# Allegro board IIC_UART_Hub_V1.0.brd
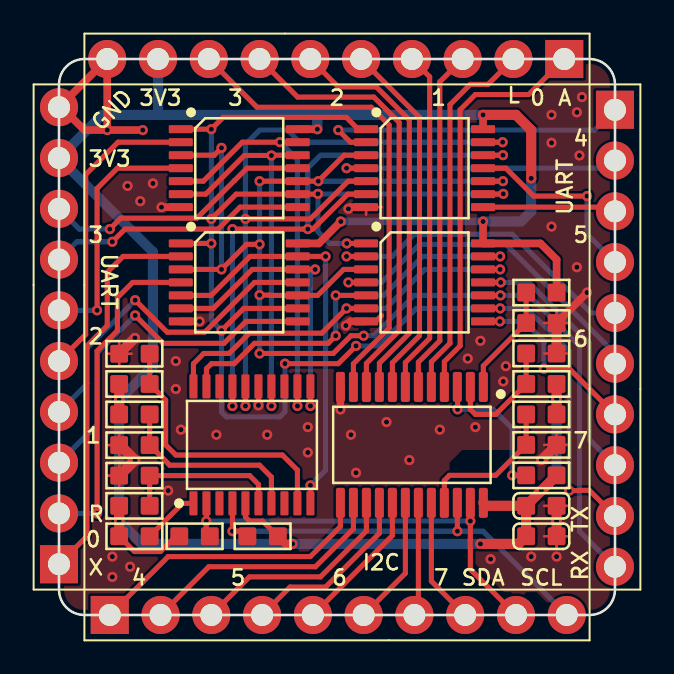
[diagram p0: board, top side]
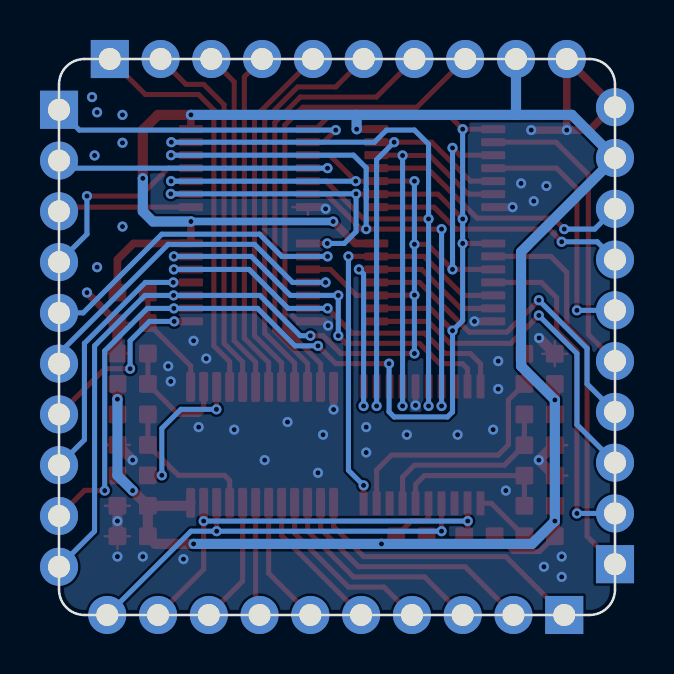
[diagram p1: board, bottom side, seen from below]

Outline 27.81 x 27.81 mm; copper layers: TOP, BOTTOM. Coordinates in mm from the lower left corner of the outline.
Outline path: 0,26.54 0,1.27 ; 0,26.54 arc(0.37,27.44) 1.27,27.81 ; 0,26.54 arc(0.37,27.44) 1.27,27.81 ; 0,26.54 0,1.27 ; 0,1.27 arc(0.37,0.37) 1.27,0 ; 0,1.27 arc(0.37,0.37) 1.27,0 ; 1.27,27.81 26.54,27.81 ; 1.27,27.81 26.54,27.81 ; 26.54,27.81 arc(27.44,27.44) 27.81,26.54 ; 26.54,27.81 arc(27.44,27.44) 27.81,26.54 ; 1.27,0 26.54,0 ; 1.27,0 26.54,0 ; 26.54,0 arc(27.44,0.37) 27.81,1.27 ; 26.54,0 arc(27.44,0.37) 27.81,1.27 ; 27.81,26.54 27.81,1.27 ; 27.81,26.54 27.81,1.27

## Design rules (mm)
constraint set DEFAULT: min track width 0.127

## Placement (name value [footprint] x y rotation side)
C1  100nF  [C0603]  24.13 3.94 0 top
C2  10uF  [C0603]  24.13 5.46 0 top
J3  Header 1x10 2.54mm  [HEADER10P_2D54_DIP]  25.27 27.81 270 top
J4  Header 1x10 2.54mm  [HEADER10P_2D54_DIP]  2.54 0 90 top
J5  Header 1x10 2.54mm  [HEADER10P_2D54_DIP]  0 2.54 180 top
J6  Header 1x10 2.54mm  [HEADER10P_2D54_DIP]  27.81 25.27 0 top
R4  10K  [R0603]  24.13 6.99 0 top
R5  DNP  [R0603]  24.13 16.13 180 top
R6  DNP  [R0603]  24.13 11.56 180 top
R7  DNP  [R0603]  24.13 10.03 180 top
R8  10K  [R0603]  24.13 14.61 180 top
R9  10K  [R0603]  24.13 13.08 180 top
R10  10K  [R0603]  24.13 8.51 180 top
R11  DNP  [R0603]  3.77 5.46 180 top
R12  10K  [R0603]  3.77 3.94 180 top
R15  DNP  [R0603]  3.77 10.03 180 top
R16  DNP  [R0603]  3.77 11.56 180 top
R23  10K  [R0603]  3.77 6.97 180 top
R24  10K  [R0603]  3.77 8.5 180 top
R25  10K  [R0603]  3.77 13.07 180 top
R26  4.7K  [R0603]  6.78 3.94 180 top
R27  4.7K  [R0603]  10.19 3.94 0 top
U1  CONTROLLER-TCA9548A  [TSSOP24_0D65_7_8X4_4X1D2MM]  17.65 8.51 180 top
U2  PCF8574  [TSSOP20-0_65-6_5X4_4X1MM]  9.65 8.51 0 top
U3  CD4066  [TSSOP14_0D65_5X4D4X1D2MM]  9.02 16.64 270 top
U4  CD4066  [TSSOP14_0D65_5X4D4X1D2MM]  18.29 22.35 270 top
U5  CD4066  [TSSOP14_0D65_5X4D4X1D2MM]  9.02 22.35 270 top
U6  CD4066  [TSSOP14_0D65_5X4D4X1D2MM]  18.29 16.64 270 top

## Library data of the parts
C1 C2 = CC
J3-J6 = Header 1x10
R4-R12 R15 R16 R23-R27 = R
U1 = TCA9548A
U2 = PCF8574
U3-U6 = CD4066

## Footprints (pads in the part's own frame, mm; a bottom-side part is the same pattern mirrored in y, then rotated)
C0603
  rrect 0.889x0.889 smd: 1(-0.762,0) 2(0.762,0)
HEADER10P_2D54_DIP
  rect 1.905x1.905 hole 1.1: 1(0,0)
  round 1.905 hole 1.1: 2(0,-2.54) 3(0,-5.08) 4(0,-7.62) 5(0,-10.16) 6(0,-12.7) 7(0,-15.24) 8(0,-17.78) 9(0,-20.32) 10(0,-22.86)
R0603
  rrect 0.889x0.889 smd: 1(-0.762,0) 2(0.762,0)
TSSOP14_0D65_5X4D4X1D2MM
  rrect 0.4x1.2 smd: 1(-1.95,-2.925) 2(-1.3,-2.925) 3(-0.65,-2.925) 4(0,-2.925) 5(0.65,-2.925) 6(1.3,-2.925) 7(1.95,-2.925) 8(1.95,2.925) 9(1.3,2.925) 10(0.65,2.925) 11(0,2.925) 12(-0.65,2.925) 13(-1.3,2.925) 14(-1.95,2.925)
TSSOP20-0_65-6_5X4_4X1MM
  rrect 0.4x1.2 smd: 1(-2.925,-2.925) 2(-2.275,-2.925) 3(-1.625,-2.925) 4(-0.975,-2.925) 5(-0.325,-2.925) 6(0.325,-2.925) 7(0.975,-2.925) 8(1.625,-2.925) 9(2.275,-2.925) 10(2.925,-2.925) 11(2.925,2.925) 12(2.275,2.925) 13(1.625,2.925) 14(0.975,2.925) 15(0.325,2.925) 16(-0.325,2.925) 17(-0.975,2.925) 18(-1.625,2.925) 19(-2.275,2.925) 20(-2.925,2.925)
TSSOP24_0D65_7_8X4_4X1D2MM
  rrect 0.45x1.5 smd: 1(-3.575,-2.9) 2(-2.925,-2.9) 3(-2.275,-2.9) 4(-1.625,-2.9) 5(-0.975,-2.9) 6(-0.325,-2.9) 7(0.325,-2.9) 8(0.975,-2.9) 9(1.625,-2.9) 10(2.275,-2.9) 11(2.925,-2.9) 12(3.575,-2.9) 13(3.575,2.9) 14(2.925,2.9) 15(2.275,2.9) 16(1.625,2.9) 17(0.975,2.9) 18(0.325,2.9) 19(-0.325,2.9) 20(-0.975,2.9) 21(-1.625,2.9) 22(-2.275,2.9) 23(-2.925,2.9) 24(-3.575,2.9)

## Nets
3V3: C1.1 C2.1 J3.9 J5.9 R4.2 R5.1 R6.1 R7.1 R11.2 R12.2 R15.2 R16.2 R26.2 R27.2 U1.24(VCC) U2.5(VCC) U3.14 U4.14 U5.14 U6.14
GND: C1.2 C2.2 J3.10 J5.10 R8.1 R9.1 R10.1 R23.2 R24.2 R25.2 U1.12 U2.15 U3.7(VSS) U4.7(VSS) U5.7(VSS) U6.7(VSS)
A0: R5.2 R8.2 U1.1
A1: R6.2 R9.2 U1.2
A2: R7.2 R10.2 U1.21
CH0: U2.10 U3.5 U3.13
CH1: U2.11 U3.6 U3.12
CH2: U2.12 U5.5 U5.13
CH3: U2.14 U5.6 U5.12
CH4: U2.16 U4.5 U4.13
CH5: U2.17 U4.6 U4.12
CH6: U2.19 U6.5 U6.13
CH7: U2.20 U6.6 U6.12
INPUT_RX: J6.10 U3.3 U3.10 U4.3 U4.10 U5.3 U5.10 U6.3 U6.10
INPUT_SCL: J4.10 R27.1 U1.22 U2.4
INPUT_SDA: J4.9 R26.1 U1.23 U2.2
INPUT_TX: J6.9 U3.1 U3.9 U4.1 U4.9 U5.1 U5.9 U6.1 U6.9
RX0: J5.2 U3.4
RX1: J5.4 U3.11
RX2: J5.6 U5.4
RX3: J5.8 U5.11
RX4: J6.2 U4.4
RX5: J6.4 U4.11
RX6: J6.6 U6.4
RX7: J6.8 U6.11
SCL_0: J3.2 U1.5
SCL_1: J3.4 U1.7
SCL_2: J3.6 U1.9
SCL_3: J3.8 U1.11
SCL_4: J4.2 U1.14
SCL_5: J4.4 U1.16
SCL_6: J4.6 U1.18
SCL_7: J4.8 U1.20
SDA_0: J3.1 U1.4
SDA_1: J3.3 U1.6
SDA_2: J3.5 U1.8
SDA_3: J3.7 U1.10
SDA_4: J4.1 U1.13
SDA_5: J4.3 U1.15
SDA_6: J4.5 U1.17
SDA_7: J4.7 U1.19
TX0: J5.1 U3.2
TX1: J5.3 U3.8
TX2: J5.5 U5.2
TX3: J5.7 U5.8
TX4: J6.1 U4.2
TX5: J6.3 U4.8
TX6: J6.5 U6.2
TX7: J6.7 U6.8
N21649397: R4.1 U1.3
N21654351: R11.1 R23.1 U2.6
N21654354: R15.1 R24.1 U2.7
N21654357: R16.1 R25.1 U2.9
N21654696: R12.1 U2.1

Pads without a net: U2 3 8 13 18

## Via types
v1: diameter 0.508, hole 0.254, TOP to BOTTOM, 119 vias

## Routing (per net, layer and track width the routed paths; a pad name or vN(x,y) marks a point on that pad's centre or on a via; arc(x,y) is an arc through that point)
3V3: length 117.6
  TOP w0.254: R27.2 10.19,4.7 9.52,4.7 9.33,4.9 U2.5 ; R26.2 5.84,3.94 5.08,3.18 3.77,3.18 R12.2
  TOP w0.381: v1(21.21,19.69) U6.14 24.09,18.59 24.89,17.78 R5.1 ; R27.2 11.33,3.56 v1(11.68,3.56) ; U5.14 v1(12.92,24.3) ; U3.14 13,18.59 v1(14.1,19.69) ; U4.14 v1(21.21,25.02)
  TOP w0.508: C2.1 v1(24.13,6.22) R4.2 ; C2.1 21.38,5.46 U1.24 ; C2.1 C1.1 22.99,3.56 v1(21.08,3.56) ; v1(23.62,21.84) 23.62,24.26 22.86,25.02 v1(21.21,25.02) ; R11.2 v1(3.01,4.7) R12.2 ; R6.1 v1(24.89,10.8) R7.1 ; R16.2 v1(3.01,10.76) R15.2
  BOTTOM w0.381: v1(14.1,19.69) v1(21.21,19.69)
  BOTTOM w0.508: v1(23.62,21.84) 23.62,20.19 23.11,19.69 v1(21.21,19.69) ; v1(24.89,10.8) R4.2 v1(24.13,6.22) ; 12.95,25.02 12.92,24.99 v1(12.92,24.3) ; 12.95,25.02 v1(21.21,25.02) ; 12.95,25.02 4.95,25.02 ; J3.9 4.95,25.02 ; 4.95,25.02 2.16,25.02 J5.9 4.7,18.16 4.7,12.45 v1(3.01,10.76) v1(3.01,4.7) 4.15,3.56 v1(11.68,3.56) v1(21.08,3.56)
GND: length 44.3
  TOP w0.127: 24.89,3.31 C1.2 ; C1.2 24.27,3.94 ; C1.2 25.51,3.94 ; 3.01,12.45 R25.2 ; R25.2 2.39,13.07 ; R25.2 3.63,13.07 ; R25.2 3.01,13.69 ; 2.39,8.5 R24.2 ; R24.2 3.01,7.87 ; R24.2 3.01,9.12 ; R8.1 24.89,15.23 ; R8.1 25.51,14.61 ; R8.1 24.27,14.61 ; R10.1 24.89,9.13 ; R10.1 24.89,7.89 ; R10.1 24.27,8.51 ; R10.1 25.51,8.51 ; 25.51,5.46 C2.2 24.27,5.46 ; 15.36,20.02 U4.7 16.14,20.4 ; 3.01,6.35 R23.2 ; R23.2 2.39,6.97 ; R23.2 3.01,7.6 ; 24.27,13.08 R9.1 25.51,13.08
  TOP w0.254: 16.14,14.98 15.84,14.69 U6.7 ; U2.15 v1(9.98,10.49)
  TOP w0.381: U1.12 v1(14.08,10.28) ; U3.7 v1(7.03,14.69) ; R8.1 v1(26.42,16.13) ; v1(14.35,14.48) 14.56,14.69 U6.7 ; 2.41,24.38 v1(2.41,24.26) v1(4.19,24.26) ; 2.41,24.38 J3.10 J5.10 0.13,25.4 1.27,24.26 2.29,24.26 2.41,24.38 ; v1(14.48,20.32) 14.56,20.4 U4.7 ; U5.7 v1(5.12,20.4)
  TOP w0.508: R23.2 3.04,6.97 v1(3.81,7.75) 3.06,8.5 R24.2 ; C2.2 v1(24.89,4.7) C1.2 ; v1(3.8,13.86) R25.2 ; R10.1 v1(24.13,7.75) ; R9.1 R8.1
  vias: v1(2.67,2.92) v1(2.67,1.91) v1(3.43,21.46) v1(3.56,2.41) v1(4.06,20.7) v1(4.7,21.59) v1(5.46,6.22) v1(5.84,12.7) v1(5.84,11.3) v1(6.1,9.27) v1(7.87,9.02) v1(10.41,9.02) v1(12.45,9.4) v1(12.45,8.13) v1(14.6,9.02) v1(14.86,7.11) v1(16.38,9.65) v1(17.53,7.75) v1(19.05,9.27) v1(20.45,12.83) v1(20.83,9.4) v1(21.08,13.72) v1(21.59,2.79) v1(22.22,11.68) v1(22.35,12.45) v1(23.62,2.92) v1(24.64,25.02) v1(24.64,23.62) v1(24.64,19.43) v1(24.89,2.92) v1(25.91,25.15) v1(25.91,17.4) v1(26.03,22.99) v1(26.16,25.91)
A0: length 5.6
  TOP w0.254: U1.1 21.23,12.47 R8.2 R5.2
A1: length 6.2
  TOP w0.254: U1.2 20.58,10.28 20.83,10.03 21.84,10.03 R6.2 R9.2
A2: length 7.5
  TOP w0.254: U1.21 19.28,6.73 19.53,6.99 21.84,6.99 R10.2 R7.2
CH0: length 20.7
  TOP w0.254: U3.5 7.61,15.99 9.55,17.94 U3.13 v1(13.33,17.94) ; U2.10 v1(12.58,6.48)
  BOTTOM w0.254: v1(12.58,6.48) 13.33,7.24 v1(13.33,17.94)
CH1: length 15.4
  TOP w0.254: U2.11 v1(12.58,10.45) ; v1(12.81,17.29) U3.12 9.67,17.29 7.72,15.34 U3.6
  BOTTOM w0.254: v1(12.58,10.45) 12.58,17.05 v1(12.81,17.29)
CH2: length 21.2
  TOP w0.254: U5.5 7.22,21.7 9.17,23.65 v1(11.05,23.65) U5.13 ; U2.12 v1(11.93,10.45)
  BOTTOM w0.254: v1(11.93,10.45) 11.93,22.77 v1(11.05,23.65)
CH3: length 20.2
  TOP w0.254: U2.14 v1(10.63,10.45) ; U5.6 7.34,21.05 9.27,22.99 v1(10.63,22.99) 10.64,23 U5.12
  BOTTOM w0.254: v1(10.63,10.45) v1(10.63,22.99)
CH4: length 35.3
  TOP w0.254: v1(9.33,19.81) 12.57,19.81 14.46,21.7 U4.5 ; U2.16 v1(9.33,10.45) ; U4.13 v1(22.2,23.65)
  BOTTOM w0.254: v1(9.33,10.45) v1(9.33,19.81) 9.33,23.55 10.03,24.26 11.43,24.26 12.03,23.65 v1(22.2,23.65)
CH5: length 31.3
  TOP w0.254: U2.17 v1(8.68,10.45) ; U4.6 14.45,21.05 12.7,19.3 v1(12.45,19.3) v1(8.68,19.3) ; U4.12 v1(22.21,23)
  BOTTOM w0.254: v1(8.68,10.45) v1(8.68,19.3) ; v1(12.45,19.3) 12.45,20.86 12.45,22.37 13.08,23 v1(22.21,23)
CH6: length 21.5
  TOP w0.254: U6.13 v1(22.07,17.94) ; U2.19 7.38,12.32 7.63,12.57 8.76,12.57 9.78,13.59 13.46,13.59 v1(13.84,13.97) ; U6.5 v1(13.84,15.99)
  BOTTOM w0.254: v1(22.07,17.94) 18.19,17.94 16.24,15.99 v1(13.84,15.99) v1(13.84,13.97)
CH7: length 20.3
  TOP w0.254: U6.12 v1(22.07,17.29) ; U6.6 v1(14.38,15.34) 13.14,14.1 9.52,14.1 8.51,13.08 7.24,13.08 6.73,12.57 U2.20
  BOTTOM w0.254: v1(22.07,17.29) 18.3,17.29 16.35,15.34 v1(14.38,15.34)
INPUT_RX: length 74.2
  TOP w0.254: U4.3 14.27,23 v1(12.97,21.7) U5.10 v1(10.03,21.7) ; U5.3 7.75,23 7.75,23.01 7.77,23.01 v1(8.13,23.37) ; U3.3 v1(8.13,17.29) 9.38,18.54 v1(10.03,18.54) ; U4.10 v1(22.21,21.7) ; v1(15.24,13.97) 14.61,13.97 13.72,13.08 v1(10.03,13.08) ; U6.3 14.24,17.29 12.94,15.99 U3.10 10.56,15.99 10.54,16 v1(10.03,16) ; U6.10 v1(22.08,15.99)
  BOTTOM w0.254: v1(10.03,13.08) v1(10.03,16) v1(10.03,18.54) v1(10.03,21.7) ; v1(8.13,23.37) v1(8.13,17.29) ; v1(22.21,21.7) v1(12.97,21.7) ; v1(15.24,13.97) 15.75,13.97 17.77,15.99 v1(22.08,15.99) 23.51,15.99 26.03,13.46 26.03,4.19 J6.10
INPUT_SCL: length 22.1
  TOP w0.254: v1(19.93,4.19) U1.22 ; R27.1 9.17,4.19 v1(8.68,4.19) U2.4
  BOTTOM w0.254: J4.10 21.21,4.19 v1(19.93,4.19) v1(8.68,4.19)
INPUT_SDA: length 21.5
  TOP w0.254: U1.23 v1(20.58,4.7) 20.58,3.77 20.57,3.77 20.57,3.35 20.58,3.34 20.58,2.28 J4.9 ; R26.1 7.37,4.11 v1(7.37,4.7) 7.38,4.71 U2.2
  BOTTOM w0.254: v1(20.58,4.7) v1(7.37,4.7)
INPUT_TX: length 83.3
  TOP w0.254: J6.9 26.53,6.24 26.05,6.24 26.03,6.22 v1(25.53,6.22) ; v1(8.13,14.22) 9.24,15.34 U3.9 ; v1(11.3,12.57) 13.97,12.57 v1(14.86,13.46) ; v1(12.95,21.07) 12.94,21.07 12.92,21.05 U5.9 8.86,21.05 v1(7.62,19.81) ; U5.1 v1(7.62,24.3) 8.21,24.89 14.37,24.89 14.96,24.3 U4.1 ; U6.1 v1(14.4,18.59) ; v1(22.23,21.07) 22.21,21.07 22.2,21.05 U4.9 ; U6.9 v1(22.07,15.34) ; U3.1 v1(7.62,18.59)
  BOTTOM w0.254: v1(25.53,6.22) 25.53,13.21 23.4,15.34 v1(22.07,15.34) 17.88,15.34 16,13.46 v1(14.86,13.46) ; v1(14.4,18.59) 13.54,18.59 12.95,19.18 12.95,19.51 12.95,19.52 v1(12.95,21.07) v1(22.23,21.07) ; v1(7.62,24.3) v1(7.62,19.81) v1(7.62,18.59) 7.62,14.73 v1(8.13,14.22) 8.13,10.16 8.38,9.91 11.05,9.91 11.3,10.16 v1(11.3,12.57)
RX0: length 16.6
  TOP w0.254: U3.4 3.68,16.64 2.92,15.88 2.92,14.22 1.9,13.21 v1(1.9,5.08)
  BOTTOM w0.254: v1(1.9,5.08) J5.2
RX1: length 17
  TOP w0.254: v1(3.81,15.75) 5.41,14.15 7.29,14.15 9.78,16.64 U3.11
  BOTTOM w0.254: J5.4 1.4,11.56 1.4,13.34 v1(3.81,15.75)
RX2: length 12.6
  TOP w0.254: v1(1.9,15.24) 1.9,21.34 2.92,22.35 U5.4
  BOTTOM w0.254: v1(1.9,15.24) J5.6
RX3: length 13.6
  TOP w0.254: U5.11 9.4,22.35 8.78,21.73 8.78,21.73 6.9,19.85 3.09,19.85 v1(2.54,19.3)
  BOTTOM w0.254: v1(2.54,19.3) 1.02,19.3 J5.8
RX4: length 14.6
  TOP w0.254: U4.4 v1(14.38,22.35)
  BOTTOM w0.254: v1(14.38,22.35) 27.43,22.35 J6.2
RX5: length 9.7
  TOP w0.254: U4.11 22.35,22.35 23.75,20.96 v1(26.42,20.96)
  BOTTOM w0.254: v1(26.42,20.96) 26.42,19.05 J6.4
RX6: length 17.8
  TOP w0.254: U6.4 v1(14.48,16.64)
  BOTTOM w0.254: v1(14.48,16.64) 16.13,16.64 18.03,18.54 22.35,18.54 27.81,13.08 J6.6
RX7: length 13.2
  TOP w0.254: U6.11 v1(22.1,16.64)
  BOTTOM w0.254: v1(22.1,16.64) 23.49,16.64 26.54,13.59 26.54,8.76 J6.8
SCL_0: length 18.6
  TOP w0.254: J3.2 21.46,26.54 20.57,26.54 19.56,25.53 19.56,13.59 18.63,12.66 U1.5
SCL_1: length 17.3
  TOP w0.254: U1.7 17.33,12.63 18.54,13.84 18.54,26.92 J3.4
SCL_2: length 20.2
  TOP w0.254: U1.9 16.03,12.6 17.53,14.1 17.53,24.76 15.88,26.42 13.97,26.42 J3.6
SCL_3: length 24.2
  TOP w0.254: U1.11 14.73,12.57 16.52,14.36 16.52,24.5 15.62,25.4 9.91,25.4 J3.8
SCL_4: length 12.7
  TOP w0.254: U1.14 14.73,4.31 12.83,2.41 7.49,2.41 J4.2
SCL_5: length 9.1
  TOP w0.254: U1.16 16.03,4.09 13.33,1.4 11.56,1.4 J4.4
SCL_6: length 6.5
  TOP w0.254: U1.18 17.33,2.09 J4.6
SCL_7: length 6.3
  TOP w0.254: J4.8 18.63,1.69 U1.20
SDA_0: length 20.4
  TOP w0.254: U1.4 19.28,12.67 20.07,13.46 20.07,25.27 20.83,26.04 23.5,26.04 J3.1
SDA_1: length 17.3
  TOP w0.254: U1.6 17.98,12.64 19.05,13.72 19.05,26.67 J3.3
SDA_2: length 18.2
  TOP w0.254: U1.8 16.68,12.61 18.03,13.97 18.03,24.89 J3.5
SDA_3: length 22.2
  TOP w0.254: J3.7 11.94,25.91 15.75,25.91 17.02,24.64 17.02,14.22 15.38,12.58 U1.10
SDA_4: length 14.6
  TOP w0.254: J4.1 5.46,2.92 12.57,2.92 14.08,4.43 U1.13
SDA_5: length 10.9
  TOP w0.254: J4.3 9.52,1.91 13.08,1.91 15.38,4.2 U1.15
SDA_6: length 7.3
  TOP w0.254: J4.5 16.68,3.98 U1.17
SDA_7: length 5.7
  TOP w0.254: J4.7 17.98,0.2 U1.19
TX0: length 19.6
  TOP w0.254: U3.2 3.2,17.94 2.41,17.15 2.41,14.48 1.4,13.46 1.4,3.94 J5.1
TX1: length 18.1
  TOP w0.254: U3.8 9.35,14.69 8.25,13.59 5.21,13.59 v1(3.81,14.99)
  BOTTOM w0.254: J5.3 1.9,9.53 1.9,13.08 v1(3.81,14.99)
TX2: length 15.3
  TOP w0.254: U5.2 2.95,23.65 1.33,22.03 1.33,14.03 J5.5
TX3: length 13
  TOP w0.254: v1(2.67,18.67) 3.3,19.3 7.96,19.3 9.06,20.4 U5.8
  BOTTOM w0.254: v1(2.67,18.67) 0.89,18.67 J5.7
TX4: length 15.9
  TOP w0.254: v1(13.97,24.26) 14.58,23.65 U4.2
  BOTTOM w0.254: v1(13.97,24.26) 26.8,24.26 J6.1
TX5: length 6.7
  TOP w0.254: J6.3 27.6,20.4 U4.8
TX6: length 16.5
  TOP w0.254: U6.2 v1(14.38,17.94)
  BOTTOM w0.254: J6.5 26.61,15.11 22.67,19.05 17.78,19.05 16.67,17.94 v1(14.38,17.94)
TX7: length 9.3
  TOP w0.254: J6.7 25.53,12.32 v1(24.26,12.32) ; U6.8 v1(22.05,14.69)
  BOTTOM w0.254: v1(24.26,12.32) 24.26,13.72 23.29,14.69 v1(22.05,14.69)
N21649397: length 7.3
  TOP w0.254: R4.1 v1(22.67,6.99) ; v1(19.94,10.29) 19.94,11.4 U1.3
  BOTTOM w0.254: v1(19.94,10.29) 21.72,10.29 22.67,9.33 v1(22.67,6.99)
N21654351: length 8.1
  TOP w0.254: U2.6 9.98,6.53 9.54,6.97 R23.1 4.53,6.16 R11.1
N21654354: length 9.6
  TOP w0.254: U2.7 10.63,6.9 10.03,7.49 5.54,7.49 R24.1 4.53,9.19 4.53,9.2 R15.1
N21654357: length 13.7
  TOP w0.254: R25.1 4.53,12.26 R16.1 5.33,10.76 5.33,8.51 5.84,8 11.18,8 11.93,7.25 U2.9
N21654696: length 2.9
  TOP w0.254: U2.1 6.18,5.58 R12.1

## Copper pours and planes (outline as drawn; the poured copper is in the pictures)
GND on TOP: 26.54,27.56 27.26,27.26 27.56,26.54 27.56,1.27 27.26,0.55 26.54,0.25 1.27,0.25 0.55,0.55 0.25,1.27 0.25,26.54 0.55,27.26 1.27,27.56 ; 44 cut-outs
GND on BOTTOM: 0.25,26.54 0.55,27.26 1.27,27.56 26.54,27.56 27.26,27.26 27.56,26.54 27.56,1.27 27.26,0.55 26.54,0.25 1.27,0.25 0.55,0.55 0.25,1.27 ; 29 cut-outs

## Text on the board
Ref Des/Silkscreen Top: 1 | 3V3 | 3 | 2 | R | X | 4 | 5 | 6 | I2C | 7 | SDA | L | SCL | 0 | A | GND | UART | TX | RX | LAYER 2 - SECONDARY SIDE - SIGNAL | LAYER 1 - PRIMARY SIDE - SIGNAL | LAYER# | COPPER WEIGHT | HALF+PLATING | (OZ) | IMPEDANCE CONTROL | +/- 10% | 50ohm SINGLE ENDED | TRACE WIDTH | TRACE WIDTH / SPACE | 90ohm DIFFERENTIAL | 100ohm DIFFERENTIAL | 9.5/5 | 6.5/5 | LAYER STACK-UP - ALL DIMENSIONS IN INCHES
User.24: FIGURE | FINISHED_SIZE | 35.43x35.43 | SLOT HOLES: TOP to BOTTOM | ALL UNITS ARE IN MILS | ROTATION | 90.000 | PLATED | QTY | 14 | TOTAL HOLES:
User.25: FIGURE | FINISHED_SIZE | 10.0 | 43.31 | DRILL CHART: TOP to BOTTOM | ALL UNITS ARE IN MILS | ROTATION | - | PLATED | QTY | 123 | 40 | 163 | TOTAL HOLES:
